# Altium PCB PCB尺子1.pcbdoc (part 2 of 2)
Units mm, origin at the board's own origin, x right, y up, seen from the top; angles counter-clockwise.
Board outline 210 x 40 mm, 2 copper layers (Top Layer, Bottom Layer); 15 components, 42 nets, 33 pads, 0 vias.
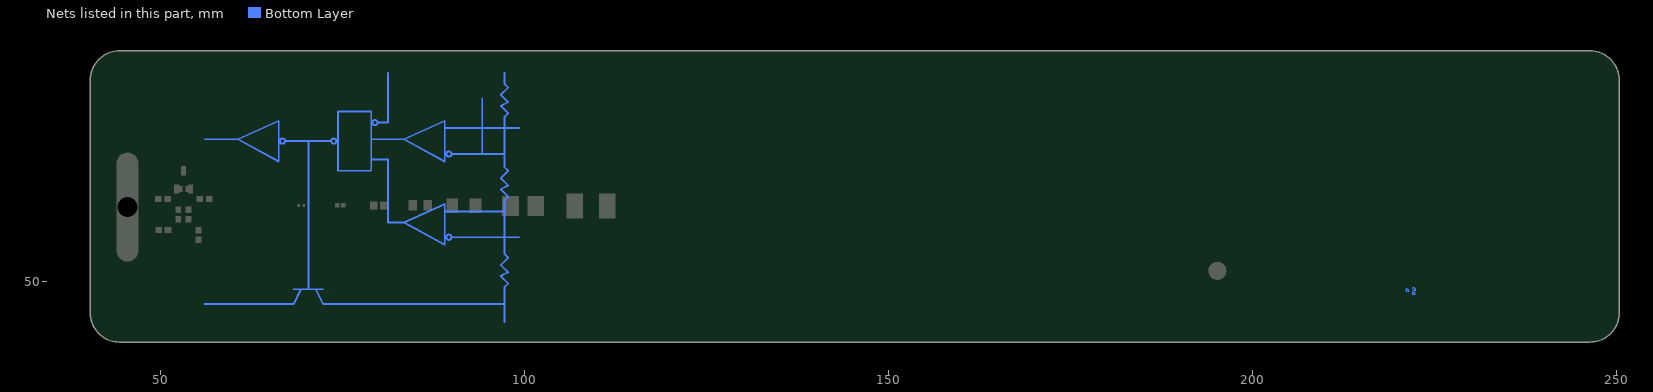
[diagram p2: the nets of this part, all layers, seen from the top]

## Nets (pads, with @x,y where several pads share a name; then routed paths per layer and width w, separated by ;. In a path a pad name is that pad's centre, name@x,y a point inside that pad or via, vN(x,y) a via of type N, cw(c..) or ccw(c..) an arc to the next point about the centre after c; other vN are vias at no path point) (continued)
S$27822:  | length 277.3
  Bottom Layer w0.254: 56.1,46.884 64.002,46.884 68.32,46.884 69.335,48.916 ; 56.125,69.515 60.697,69.515 ; 68.32,48.916 72.384,48.916 ; 70.347,69.261 70.349,54.529 70.349,48.966 ; 71.365,48.916 72.383,46.884 97.275,46.884 ; 73.47,69.261 67.152,69.261 ; 78.985,66.761 78.985,66.721 81.271,66.721 81.271,58.085 83.503,58.085 ; 78.985,69.515 83.503,69.515 ; 81.271,78.659 81.271,71.801 79.852,71.801 ; 89.091,59.614 96.203,59.609 97.273,59.609 ; 89.091,71.041 96.203,71.039 99.305,71.039 ; 90.034,56.053 95.187,56.053 99.305,56.053 ; 90.034,67.483 95.187,67.483 96.257,67.483 97.273,67.483 97.273,72.563 97.781,73.071 96.765,74.087 97.781,74.595 96.765,75.611 97.781,76.627 97.273,77.135 97.273,78.659 ; 94.225,67.483 94.225,75.103 ; 97.273,44.369 97.273,46.909 97.273,49.195 97.781,49.703 96.765,50.719 97.781,51.227 96.765,52.243 97.781,53.259 97.273,53.767 97.273,54.529 97.273,59.609 ; 97.273,67.229 97.273,65.705 97.781,65.197 96.765,64.181 97.781,63.165 96.765,62.657 97.781,61.641 97.273,61.133 97.273,59.609 ; 60.697,69.515 66.285,66.467 66.285,72.055 60.697,69.515 ; 67.152,69.261 ccw(c66.793,69.261) 67.152,69.261 ; 79.852,71.801 ccw(c79.493,71.801) 79.852,71.801 ; 83.503,58.085 89.091,55.037 89.091,60.625 83.503,58.085 ; 83.503,69.515 89.091,66.467 89.091,72.055 83.503,69.515 ; 74.188,69.261 ccw(c73.829,69.261) 74.188,69.261 ; 74.413,65.197 78.985,65.197 78.985,72.817 78.985,73.325 74.413,73.325 74.413,65.197 ; 90.012,56.053 ccw(c89.653,56.053) 90.012,56.053 ; 90.012,67.483 ccw(c89.653,67.483) 90.012,67.483
S$31542:  | length 3.7
  Bottom Layer w0.076: 221.526,48.627 ccw(c221.216,48.627) 221.216,48.938 221.173,48.938 ccw(c221.173,48.862) 221.098,48.862 221.098,48.844 ccw(c221.324,48.844) 221.324,48.618 221.535,48.618 ; 222.402,48.213 ccw(c222.092,48.213) 222.092,48.523 222.049,48.523 ccw(c222.049,48.448) 221.974,48.448 221.974,48.429 ccw(c222.2,48.429) 222.2,48.203 222.412,48.203 ; 222.448,48.815 ccw(c222.138,48.815) 222.138,49.126 222.095,49.126 ccw(c222.095,49.05) 222.02,49.05 222.02,49.032 ccw(c222.246,49.032) 222.246,48.806 222.457,48.806
pads on no net: 0201.1 0201.2 0402.1 0402.2 0603.1 0603.2 0805.1 0805.2 1206.1 1206.2 1210.1 1210.2 1812.1 1812.2 C1.1 C1.2 C2.1 C2.2 C3.1 C3.2 C4.1 C4.2 C5.1 C5.2 C6.1 C6.2 C7.1 C7.2 U6.1 U6.2 U6.3
copper on no net: | length 5
  Top Layer w0.35: 205.867,76.534 205.867,81.534

## Keep-outs
Top Layer:
  lines w0.3 net 1: 180.059,51.318 177.705,51.318 cw(c195.094,51.386) 212.482,51.301 210.441,51.301 ; 180.059,51.318 cw(c195.25,51.453) 210.441,51.301
Keep-Out Layer:
  pour cut-out: 177.69,51.442 177.688,52.064 177.772,53.307 177.945,54.541 178.206,55.759 178.553,56.955 178.985,58.123 179.499,59.257 180.093,60.352 180.764,61.401 181.509,62.4 182.322,63.343 183.202,64.225 184.142,65.042 185.138,65.79 186.185,66.464 187.278,67.062 188.41,67.581 189.577,68.016 190.772,68.368 191.989,68.633 193.222,68.81 194.464,68.898 195.71,68.898 196.952,68.808 198.185,68.629 199.402,68.363 200.596,68.011 201.763,67.574 202.895,67.055 203.987,66.456 205.033,65.78 206.029,65.031 206.968,64.213 207.846,63.33 208.659,62.387 209.403,61.387 210.072,60.337 210.666,59.242 211.179,58.107 211.61,56.938 211.956,55.742 212.215,54.524 212.387,53.29 212.47,52.047 212.467,51.425 210.426,51.425 210.42,52.025 210.337,53.222 210.16,54.409 209.89,55.578 209.528,56.722 209.078,57.834 208.54,58.907 207.92,59.935 207.221,60.91 206.447,61.827 205.603,62.68 204.694,63.463 203.726,64.173 202.706,64.804 201.638,65.352 200.531,65.815 199.391,66.188 198.224,66.471 197.04,66.66 195.843,66.756 194.643,66.756 193.447,66.662 192.262,66.474 191.095,66.193 189.955,65.821 188.847,65.36 187.779,64.812 186.757,64.183 185.789,63.474 184.879,62.691 184.034,61.839 183.259,60.923 182.559,59.949 181.937,58.922 181.399,57.85 180.947,56.738 180.584,55.594 180.313,54.426 180.134,53.239 180.05,52.042 180.044,51.442 180.043,51.442
  pour cut-out: 177.69,51.442 177.688,52.064 177.772,53.307 177.945,54.541 178.206,55.759 178.553,56.955 178.985,58.123 179.499,59.257 180.093,60.352 180.764,61.401 181.509,62.4 182.322,63.343 183.202,64.225 184.142,65.042 185.138,65.79 186.185,66.464 187.278,67.062 188.41,67.581 189.577,68.016 190.772,68.368 191.989,68.633 193.222,68.81 194.464,68.898 195.71,68.898 196.952,68.808 198.185,68.629 199.402,68.363 200.596,68.011 201.763,67.574 202.895,67.055 203.987,66.456 205.033,65.78 206.029,65.031 206.968,64.213 207.846,63.33 208.659,62.387 209.403,61.387 210.072,60.337 210.666,59.242 211.179,58.107 211.61,56.938 211.956,55.742 212.215,54.524 212.387,53.29 212.47,52.047 212.467,51.425 210.426,51.425 210.42,52.025 210.337,53.222 210.16,54.409 209.89,55.578 209.528,56.722 209.078,57.834 208.54,58.907 207.92,59.935 207.221,60.91 206.447,61.827 205.603,62.68 204.694,63.463 203.726,64.173 202.706,64.804 201.638,65.352 200.531,65.815 199.391,66.188 198.224,66.471 197.04,66.66 195.843,66.756 194.643,66.756 193.447,66.662 192.262,66.474 191.095,66.193 189.955,65.821 188.847,65.36 187.779,64.812 186.757,64.183 185.789,63.474 184.879,62.691 184.034,61.839 183.259,60.923 182.559,59.949 181.937,58.922 181.399,57.85 180.947,56.738 180.584,55.594 180.313,54.426 180.134,53.239 180.05,52.042 180.044,51.442 180.043,51.442
  pour cut-out: 177.69,51.442 177.688,52.064 177.772,53.307 177.945,54.541 178.206,55.759 178.553,56.955 178.985,58.123 179.499,59.257 180.093,60.352 180.764,61.401 181.509,62.4 182.322,63.343 183.202,64.225 184.142,65.042 185.138,65.79 186.185,66.464 187.278,67.062 188.41,67.581 189.577,68.016 190.772,68.368 191.989,68.633 193.222,68.81 194.464,68.898 195.71,68.898 196.952,68.808 198.185,68.629 199.402,68.363 200.596,68.011 201.763,67.574 202.895,67.055 203.987,66.456 205.033,65.78 206.029,65.031 206.968,64.213 207.846,63.33 208.659,62.387 209.403,61.387 210.072,60.337 210.666,59.242 211.179,58.107 211.61,56.938 211.956,55.742 212.215,54.524 212.387,53.29 212.47,52.047 212.467,51.425 210.426,51.425 210.42,52.025 210.337,53.222 210.16,54.409 209.89,55.578 209.528,56.722 209.078,57.834 208.54,58.907 207.92,59.935 207.221,60.91 206.447,61.827 205.603,62.68 204.694,63.463 203.726,64.173 202.706,64.804 201.638,65.352 200.531,65.815 199.391,66.188 198.224,66.471 197.04,66.66 195.843,66.756 194.643,66.756 193.447,66.662 192.262,66.474 191.095,66.193 189.955,65.821 188.847,65.36 187.779,64.812 186.757,64.183 185.789,63.474 184.879,62.691 184.034,61.839 183.259,60.923 182.559,59.949 181.937,58.922 181.399,57.85 180.947,56.738 180.584,55.594 180.313,54.426 180.134,53.239 180.05,52.042 180.044,51.442 180.043,51.442
  pour cut-out: 199 vertices and 0 holes, not listed, extent 177.539,51.316 212.618,69.049
  pour cut-out: 199 vertices and 0 holes, not listed, extent 177.539,51.316 212.618,69.049
  lines w0.254: 40.4,45.653 ccw(c44.4,45.653) 44.4,41.653 246.4,41.653 ccw(c246.4,45.653) 250.4,45.653 250.4,77.653 ccw(c246.4,77.653) 246.4,81.653 44.4,81.653 ccw(c44.4,77.653) 40.4,77.653 40.4,45.653
  lines w0.3: 177.69,51.442 cw(c195.079,51.509) 212.467,51.425 210.426,51.425 ; 177.69,51.442 180.043,51.442 ; 180.044,51.442 cw(c195.235,51.576) 210.426,51.425

## Other copper
Top Layer:
  pour cut-out: 199 vertices and 0 holes, not listed, extent 177.555,51.193 212.633,68.925
  pour cut-out: 199 vertices and 0 holes, not listed, extent 177.555,51.193 212.633,68.925
  pour cut-out: 177.705,51.318 177.703,51.941 177.787,53.184 177.96,54.417 178.221,55.635 178.568,56.831 179,58 179.514,59.134 180.108,60.229 180.779,61.278 181.524,62.277 182.338,63.219 183.217,64.102 184.157,64.919 185.153,65.666 186.2,66.341 187.293,66.939 188.425,67.457 189.592,67.893 190.787,68.244 192.004,68.509 193.237,68.686 194.48,68.775 195.725,68.774 196.967,68.684 198.2,68.506 199.417,68.24 200.611,67.888 201.778,67.451 202.91,66.931 204.002,66.332 205.048,65.657 206.044,64.908 206.983,64.09 207.861,63.207 208.674,62.263 209.418,61.264 210.088,60.214 210.681,59.119 211.194,57.984 211.625,56.815 211.971,55.618 212.23,54.4 212.402,53.167 212.485,51.924 212.482,51.301 210.441,51.301 210.435,51.901 210.352,53.098 210.175,54.285 209.905,55.454 209.544,56.599 209.093,57.711 208.556,58.784 207.936,59.811 207.236,60.786 206.462,61.703 205.618,62.556 204.709,63.34 203.742,64.05 202.721,64.68 201.654,65.229 200.546,65.691 199.406,66.065 198.24,66.347 197.055,66.537 195.859,66.632 194.659,66.633 193.462,66.539 192.277,66.351 191.111,66.07 189.97,65.697 188.862,65.236 187.794,64.689 186.773,64.059 185.804,63.351 184.894,62.568 184.049,61.716 183.274,60.8 182.574,59.826 181.953,58.799 181.414,57.726 180.962,56.615 180.599,55.471 180.328,54.302 180.15,53.115 180.066,51.918 180.059,51.318
  pour cut-out: 177.705,51.318 177.703,51.941 177.787,53.184 177.96,54.417 178.221,55.635 178.568,56.831 179,58 179.514,59.134 180.108,60.229 180.779,61.278 181.524,62.277 182.338,63.219 183.217,64.102 184.157,64.919 185.153,65.666 186.2,66.341 187.293,66.939 188.425,67.457 189.592,67.893 190.787,68.244 192.004,68.509 193.237,68.686 194.48,68.775 195.725,68.774 196.967,68.684 198.2,68.506 199.417,68.24 200.611,67.888 201.778,67.451 202.91,66.931 204.002,66.332 205.048,65.657 206.044,64.908 206.983,64.09 207.861,63.207 208.674,62.263 209.418,61.264 210.088,60.214 210.681,59.119 211.194,57.984 211.625,56.815 211.971,55.618 212.23,54.4 212.402,53.167 212.485,51.924 212.482,51.301 210.441,51.301 210.435,51.901 210.352,53.098 210.175,54.285 209.905,55.454 209.544,56.599 209.093,57.711 208.556,58.784 207.936,59.811 207.236,60.786 206.462,61.703 205.618,62.556 204.709,63.34 203.742,64.05 202.721,64.68 201.654,65.229 200.546,65.691 199.406,66.065 198.24,66.347 197.055,66.537 195.859,66.632 194.659,66.633 193.462,66.539 192.277,66.351 191.111,66.07 189.97,65.697 188.862,65.236 187.794,64.689 186.773,64.059 185.804,63.351 184.894,62.568 184.049,61.716 183.274,60.8 182.574,59.826 181.953,58.799 181.414,57.726 180.962,56.615 180.599,55.471 180.328,54.302 180.15,53.115 180.066,51.918 180.059,51.318
  pour cut-out: 177.705,51.318 177.703,51.941 177.787,53.184 177.96,54.417 178.221,55.635 178.568,56.831 179,58 179.514,59.134 180.108,60.229 180.779,61.278 181.524,62.277 182.338,63.219 183.217,64.102 184.157,64.919 185.153,65.666 186.2,66.341 187.293,66.939 188.425,67.457 189.592,67.893 190.787,68.244 192.004,68.509 193.237,68.686 194.48,68.775 195.725,68.774 196.967,68.684 198.2,68.506 199.417,68.24 200.611,67.888 201.778,67.451 202.91,66.931 204.002,66.332 205.048,65.657 206.044,64.908 206.983,64.09 207.861,63.207 208.674,62.263 209.418,61.264 210.088,60.214 210.681,59.119 211.194,57.984 211.625,56.815 211.971,55.618 212.23,54.4 212.402,53.167 212.485,51.924 212.482,51.301 210.441,51.301 210.435,51.901 210.352,53.098 210.175,54.285 209.905,55.454 209.544,56.599 209.093,57.711 208.556,58.784 207.936,59.811 207.236,60.786 206.462,61.703 205.618,62.556 204.709,63.34 203.742,64.05 202.721,64.68 201.654,65.229 200.546,65.691 199.406,66.065 198.24,66.347 197.055,66.537 195.859,66.632 194.659,66.633 193.462,66.539 192.277,66.351 191.111,66.07 189.97,65.697 188.862,65.236 187.794,64.689 186.773,64.059 185.804,63.351 184.894,62.568 184.049,61.716 183.274,60.8 182.574,59.826 181.953,58.799 181.414,57.726 180.962,56.615 180.599,55.471 180.328,54.302 180.15,53.115 180.066,51.918 180.059,51.318
  text "T-V-B挖孔" at 190.373,85.09 h1.52
  text "15" at 195.282,74.289 h2.5
  text "14" at 185.083,72.949 h2.5
  text "17" at 215.082,72.949 h2.5
  text "12" at 165.083,72.921 h2.5
  text "13" at 175.083,72.921 h2.5 r359
  text "90" at 194.247,72.935 h1.5
  text "16" at 205.082,72.922 h2.5 r359
  text "18" at 225.082,72.924 h2.5 r359
  text "19" at 235.082,72.921 h2.5 r359
  text "20" at 245.176,72.921 h2.5
  text "1" at 55.01,72.589 h2.5 r180
  text "5" at 95.15,72.59 h2.5 r179
  text "7" at 115.092,72.589 h2.5 r180
  text "11" at 155.01,72.59 h2.5
  text "8" at 125.099,72.557 h2.5 r181
  text "0mm" at 45.106,72.555 h2.5
  text "2" at 65.127,72.554 h2.5 r181
  text "3" at 75.15,72.554 h2.5 r178
  text "6" at 105.091,72.554 h2.5 r181
  text "9" at 135.115,72.554 h2.5 r181
  text "10" at 145.01,72.554 h2.5 r359
  text "4" at 85.216,72.439 h2.5 r149
  text "135" at 178.342,67.07 h1.5 r359
  text "45" at 210.727,66.816 h1.5
  text "英制 Mil" at 58.173,63.53 h2
  text "70°C & W" at 58.112,56.369 h2
  text "1/20" at 67.559,56.314 h2 r7
  text "1/16" at 72.56,56.316 h2 r1
  text "1/10" at 78.059,56.314 h2 r7
  text "1/8" at 84.061,56.314 h2 r5
  text "1/4" at 90.059,56.316 h2 r7
  text "1/3" at 98.059,56.314 h2 r5
  text "1/2" at 107.559,56.314 h2 r5
  text "0" at 217.458,52.084 h1.5 r183
  text "180" at 171.103,51.195 h1.5
  text "8000" at 243.098,49.554 h2.5
  text "2000" at 94.75,48.953 h2.5
  text "3000" at 119.75,48.953 h2.5
  text "5000" at 170.75,48.953 h2.5
  text "7000" at 221.25,48.953 h2.5
  text "1000" at 69.124,48.804 h2.5
  text "0mil" at 43.682,48.718 h2.5
  text "4000" at 145.219,48.104 h2.5
Bottom Layer:
  region net S$27822: 72.32,48.535 71.024,47.874 72.218,47.214
  text "RESET" at 83.176,79.248 h1.2
  text "VCC" at 98.459,79.248 h1.2
  text "70mil" at 206.196,78.32 h2
  text "20mil" at 241.207,78.296 h2
  text "60mil" at 213.407,78.277 h2
  text "50mil" at 220.408,78.277 h2
  text "40mil" at 227.407,78.276 h2
  text "10mil" at 247.907,78.277 h2
  text "30mil" at 234.648,78.266 h2
  text "4" at 82.795,77.719 h1.2 r31
  text "8" at 99,77.701 h1.2 r356
  text "CONT" at 95.84,75.896 h1.2
  text "5" at 95.368,74.366 h1.2 r5
  text "90" at 196.416,72.816 h1.5
  text "100" at 192.929,72.715 h1.5
  text "80" at 200.116,72.515 h1.5
  text "110" at 188.829,71.815 h1.5 r1
  text "70" at 203.516,71.716 h1.5 r359
  text "6" at 98.998,71.552 h1.2 r359
  text "R1" at 78.51,71.418 h1.2
  text "THRES" at 103.785,70.46 h1.2
  text "120" at 185.429,70.416 h1.5 r1
  text "3" at 56.785,70.099 h1.2 r2
  text "60" at 207.514,69.816 h1.5
  text "R" at 78.515,69.259 h1.2
  text "OUT" at 55.553,69.038 h1.2
  text "1" at 75.477,68.827 h1.2
  text "130" at 182.329,68.316 h1.5
  text "50" at 210.716,67.615 h1.5
  text "135" at 180.607,66.815 h1.5 r1
  text "45" at 212.093,66.436 h1.5
  text "S" at 78.436,66.371 h1.2 r4
  text "http://oshwhub.com" at 160.917,65.7 h5
  text "140" at 179.028,65.115 h1.5 r1
  text "40" at 213.215,65.117 h1.5 r1
  text "150" at 176.73,61.917 h1.5
  text "30" at 215.417,61.915 h1.5
  text "立创EDA硬件开源平台" at 152.535,59.065 h3.3
  text "160" at 175.23,58.417 h1.5
  text "20" at 217.116,58.417 h1.5
  text "2" at 98.982,56.536 h1.2 r359
  text "TRIG" at 102.602,55.576 h1.2
  text "170" at 174.328,54.617 h1.5 r1
  text "10" at 218.015,54.616 h1.5 r1
  text "让分享成为一种习惯" at 154.913,52.459 h4.06
  text "180" at 173.729,51.317 h1.5
  text "0" at 217.501,51.316 h1.5 r357
  text "7" at 56.818,47.44 h1.2
  text "DISCH" at 55.594,46.508 h1.2
  text "1" at 99.036,44.494 h1.2
  text "555 Simplified Schematic" at 82.599,43.127 h2.5
  text "GND" at 98.637,42.774 h1.2 r1

## Silkscreen, mask and mechanical layers (free items; w line width, h text height)
Top Overlay:
  lines w0.15: 146.216,53.039 170.216,53.039 ; 146.216,55.439 170.216,55.439 ; 146.216,57.839 170.216,57.839 ; 146.216,60.239 170.216,60.239 ; 146.216,62.439 170.216,62.439 ; 146.216,64.939 170.216,64.939 ; 146.216,67.439 170.216,67.439 ; 146.216,69.747 170.216,69.747 ; 154.201,62.439 154.201,69.747 ; 154.216,50.439 154.216,60.139 ; 146.216,50.439 170.216,50.439 170.216,71.939 146.216,71.939 146.216,50.439
Bottom Overlay:
  text "JLCJLCJLCJLC" at 41.204,56.717 h0.8 r270
Top Solder:
  drawing of 796 lines, arcs and shapes, not listed
  text "15" at 195.282,74.289 h2.5
  text "14" at 185.083,72.95 h2.5
  text "17" at 215.083,72.95 h2.5
  text "12" at 165.083,72.922 h2.5
  text "13" at 175.083,72.922 h2.5 r359
  text "16" at 205.083,72.922 h2.5 r359
  text "18" at 225.083,72.925 h2.5 r359
  text "19" at 235.083,72.922 h2.5 r359
  text "20" at 245.177,72.922 h2.5
  text "1" at 55.01,72.589 h2.5 r180
  text "5" at 95.15,72.59 h2.5 r179
  text "7" at 115.092,72.589 h2.5 r180
  text "11" at 155.01,72.59 h2.5
  text "8" at 125.099,72.557 h2.5 r181
  text "0mm" at 45.106,72.555 h2.5
  text "2" at 65.127,72.554 h2.5 r181
  text "3" at 75.15,72.554 h2.5 r178
  text "6" at 105.091,72.554 h2.5 r181
  text "9" at 135.115,72.554 h2.5 r181
  text "10" at 145.01,72.554 h2.5 r359
  text "4" at 85.216,72.439 h2.5 r149
  text "C" at 142.322,71.158 h1.2 r181
  text "C" at 142.279,71.121 h1.2 r181
  text "NPN管工作状态" at 152.169,70.067 h1.6
  text "NPN管工作状态" at 152.17,70.065 h1.6
  text "Vc > Vb > Ve" at 155.713,68.085 h1.7
  text "Vc > Vb > Ve" at 155.714,68.084 h1.7
  text "放大区" at 147.571,68.019 h1.7
  text "放大区" at 147.572,68.017 h1.7
  text "B" at 136.951,67.951 h1.2 r180
  text "B" at 136.951,67.951 h1.2 r180
  text "肖特基二极管" at 124.735,65.756 h2
  text "肖特基二极管" at 124.735,65.756 h2
  text "普通二极管" at 114.105,65.653 h2
  text "普通二极管" at 114.105,65.653 h2
  text "Vb>Ve、Vb>Vc" at 155.713,65.585 h1.7
  text "Vb>Ve、Vb>Vc" at 155.714,65.583 h1.7
  text "饱和区" at 147.556,65.521 h1.7
  text "饱和区" at 147.557,65.519 h1.7
  text "E" at 142.369,63.604 h1.2 r180
  text "E" at 142.369,63.604 h1.2 r180
  text "英制 Mil" at 58.173,63.53 h2
  text "0402" at 72.483,63.508 h2
  text "0201" at 67.134,63.423 h2
  text "0603" at 77.633,63.423 h2
  text "0805" at 83.133,63.423 h2
  text "1206" at 89.06,63.422 h2
  text "1210" at 97.061,63.423 h2
  text "1812" at 106.561,63.423 h2
  text "截止区" at 147.558,63.019 h1.7
  text "截止区" at 147.559,63.017 h1.7
  text "Vbe < 0.7V（硅管）" at 155.712,62.985 h1.7
  text "Vbe < 0.7V（硅管）" at 155.713,62.983 h1.7
  text "NPN" at 136.044,62.95 h2
  text "NPN" at 136.044,62.95 h2
  text "PNP管工作状态" at 152.008,60.618 h1.6
  text "PNP管工作状态" at 152.009,60.616 h1.6
  text "E" at 142.369,59.348 h1.2 r180
  text "E" at 142.369,59.348 h1.2 r180
  text "发光二极管" at 114.245,59.255 h2
  text "发光二极管" at 114.245,59.255 h2
  text "稳压二极管" at 126.161,59.175 h2
  text "稳压二极管" at 126.161,59.175 h2
  text "放大区" at 147.573,58.517 h1.7
  text "放大区" at 147.574,58.515 h1.7
  text "Ve > Vb > Vc" at 155.712,58.487 h1.7
  text "Ve > Vb > Vc" at 155.713,58.485 h1.7
  text "B" at 137.001,56.551 h1.2 r180
  text "B" at 137.001,56.551 h1.2 r180
  text "70°C & W" at 58.112,56.369 h2
  text "1/20" at 67.559,56.314 h2 r7
  text "1/16" at 72.56,56.316 h2 r1
  text "1/10" at 78.059,56.314 h2 r7
  text "1/8" at 84.061,56.314 h2 r5
  text "1/4" at 90.059,56.316 h2 r7
  text "1/3" at 98.059,56.314 h2 r5
  text "1/2" at 107.559,56.314 h2 r5
  text "Vb<Ve、Vb<Vc" at 155.712,56.087 h1.7
  text "Vb<Ve、Vb<Vc" at 155.713,56.085 h1.7
  text "饱和区" at 147.556,55.922 h1.7
  text "饱和区" at 147.557,55.921 h1.7
  text "Veb < 0.7（硅管）" at 155.612,53.684 h1.7
  text "Veb < 0.7（硅管）" at 155.613,53.682 h1.7
  text "截止区" at 147.558,53.621 h1.7
  text "截止区" at 147.559,53.619 h1.7
  text "光电二极管" at 114.216,52.437 h2
  text "光电二极管" at 114.216,52.437 h2
  text "变容二极管" at 125.607,52.246 h2
  text "变容二极管" at 125.607,52.246 h2
  text "C" at 142.279,52.101 h1.2 r181
  text "C" at 142.279,52.101 h1.2 r181
  text "PNP" at 136.045,51.449 h2
  text "PNP" at 136.045,51.449 h2
  text "Δ I c = β Δ I b" at 155.66,51.063 h1.7 r2
  text "Δ I c = β Δ I b" at 155.661,51.062 h1.7 r2
  text "重要公式" at 146.92,51.026 h1.7
  text "重要公式" at 146.921,51.024 h1.7
  text "8000" at 243.1,49.546 h2.5
  text "2000" at 94.751,48.953 h2.5
  text "3000" at 119.751,48.953 h2.5
  text "5000" at 170.751,48.953 h2.5
  text "7000" at 221.251,48.953 h2.5
  text "1000" at 69.125,48.804 h2.5
  text "0mil" at 43.682,48.718 h2.5
  text "4000" at 145.219,48.104 h2.5
Bottom Solder:
  circle w0.254: c70.349,69.236 r0.254
  circle w0.254: c89.642,67.483 r0.359
  circle w0.254: c89.642,56.053 r0.359
  circle w0.254: c94.214,67.483 r0.254
  circle w0.254: c97.262,67.483 r0.254
  circle w0.254: c97.262,59.609 r0.254
  circle w0.254: c73.818,69.261 r0.359
  circle w0.254: c66.782,69.261 r0.359
  circle w0.254: c79.482,71.801 r0.359
  circle w0.254: c97.262,46.884 r0.254
  region: 72.309,48.535 71.013,47.874 72.207,47.214
  lines w0.076: 221.526,48.629 ccw(c221.216,48.629) 221.216,48.939 221.173,48.939 ccw(c221.173,48.864) 221.098,48.864 221.098,48.845 ccw(c221.324,48.845) 221.324,48.619 221.535,48.619 ; 222.402,48.214 ccw(c222.092,48.214) 222.092,48.525 222.049,48.525 ccw(c222.049,48.449) 221.974,48.449 221.974,48.431 ccw(c222.2,48.431) 222.2,48.205 222.412,48.205 ; 222.448,48.817 ccw(c222.138,48.817) 222.138,49.127 222.095,49.127 ccw(c222.095,49.052) 222.02,49.052 222.02,49.033 ccw(c222.246,49.033) 222.246,48.807 222.457,48.807 ; 245.45,38.1 ccw(c245.45,38.326) 245.676,38.326
  lines w0.254: 56.089,46.884 63.991,46.884 68.309,46.884 69.324,48.916 ; 56.114,69.515 60.686,69.515 ; 67.141,69.261 73.459,69.261 ; 68.309,48.916 72.373,48.916 ; 70.336,69.261 70.338,54.529 70.338,48.966 ; 71.354,48.916 72.372,46.884 97.264,46.884 ; 78.974,66.761 78.974,66.721 81.26,66.721 81.26,58.085 83.492,58.085 ; 78.974,69.515 83.492,69.515 ; 79.841,71.801 81.26,71.801 81.26,78.659 ; 89.08,59.614 96.192,59.609 97.262,59.609 ; 89.08,71.041 96.192,71.039 99.294,71.039 ; 90.023,56.053 95.176,56.053 99.294,56.053 ; 90.023,67.483 95.176,67.483 96.246,67.483 97.262,67.483 97.262,72.563 97.77,73.071 96.754,74.087 97.77,74.595 96.754,75.611 97.77,76.627 97.262,77.135 97.262,78.659 ; 94.214,67.483 94.214,75.103 ; 97.262,44.369 97.262,46.909 97.262,49.195 97.77,49.703 96.754,50.719 97.77,51.227 96.754,52.243 97.77,53.259 97.262,53.767 97.262,54.529 97.262,59.609 ; 97.262,67.229 97.262,65.705 97.77,65.197 96.754,64.181 97.77,63.165 96.754,62.657 97.77,61.641 97.262,61.133 97.262,59.609 ; 60.686,69.515 66.274,66.467 66.274,72.055 60.686,69.515 ; 83.492,58.085 89.08,55.037 89.08,60.625 83.492,58.085 ; 83.492,69.515 89.08,66.467 89.08,72.055 83.492,69.515 ; 74.402,65.197 78.974,65.197 78.974,72.817 78.974,73.325 74.402,73.325 74.402,65.197
  lines w0.356: 174.57,55.151 192.735,51.907 ; 175.49,58.59 192.846,52.319 ; 177.043,61.942 193.028,52.712 ; 179.203,65.019 193.275,53.065 ; 180.373,66.294 193.424,53.228 ; 181.873,67.66 193.583,53.374 ; 184.773,69.67 193.939,53.624 ; 187.96,71.163 194.336,53.809 ; 191.572,72.143 194.752,53.92 ; 192.696,51.47 cw(c195.185,51.47) 197.674,51.47 ; 195.199,72.467 195.216,51.439 ; 195.62,53.92 198.793,72.165 ; 196.036,53.808 202.455,71.19 ; 196.429,53.625 205.661,69.702 ; 196.781,53.379 208.772,67.529 ; 196.945,53.23 210.165,66.245 ; 197.084,53.078 211.456,64.816 ; 197.337,52.72 213.429,61.971 ; 197.515,52.344 214.947,58.735 ; 197.638,51.892 215.969,54.86 ; 243.216,75.439 246.216,75.439
  lines w0.402: 174.245,51.467 cw(c195.245,51.467) 216.245,51.467 ; 174.245,51.467 cw(c195.245,51.467) 216.245,51.467 ; 174.245,51.467 216.245,51.467
  lines w0.61: 237.206,75.468 240.206,75.468
  lines w0.864: 230.216,75.439 233.216,75.439
  lines w1.118: 223.216,75.439 226.216,75.439
  lines w1.372: 216.216,75.439 219.216,75.439
  lines w1.626: 209.182,75.359 212.182,75.359
  lines w1.88: 201.716,75.439 204.716,75.439
  text "RESET" at 83.165,79.248 h1.2
  text "VCC" at 98.448,79.248 h1.2
  text "70mil" at 206.196,78.32 h2
  text "20mil" at 241.207,78.296 h2
  text "60mil" at 213.407,78.277 h2
  text "50mil" at 220.408,78.277 h2
  text "40mil" at 227.407,78.276 h2
  text "10mil" at 247.907,78.277 h2
  text "30mil" at 234.648,78.266 h2
  text "4" at 82.784,77.719 h1.2 r31
  text "8" at 98.989,77.701 h1.2 r356
  text "CONT" at 95.829,75.896 h1.2
  text "5" at 95.357,74.366 h1.2 r5
  text "90" at 196.416,72.816 h1.5
  text "100" at 192.929,72.715 h1.5
  text "80" at 200.116,72.515 h1.5
  text "110" at 188.829,71.815 h1.5 r1
  text "70" at 203.516,71.716 h1.5 r359
  text "6" at 98.987,71.552 h1.2 r359
  text "R1" at 78.51,71.418 h1.2
  text "THRES" at 103.775,70.46 h1.2
  text "120" at 185.429,70.416 h1.5 r1
  text "3" at 56.774,70.099 h1.2 r2
  text "60" at 207.514,69.816 h1.5
  text "R" at 78.515,69.259 h1.2
  text "OUT" at 55.542,69.038 h1.2
  text "1" at 75.477,68.827 h1.2
  text "130" at 182.329,68.316 h1.5
  text "50" at 210.716,67.615 h1.5
  text "135" at 180.607,66.815 h1.5 r1
  text "45" at 212.093,66.436 h1.5
  text "S" at 78.436,66.371 h1.2 r4
  text "http://oshwhub.com" at 160.917,65.7 h5
  text "140" at 179.028,65.115 h1.5 r1
  text "40" at 213.215,65.117 h1.5 r1
  text "150" at 176.73,61.917 h1.5
  text "30" at 215.417,61.915 h1.5
  text "立创EDA硬件开源平台" at 152.535,59.065 h3.3
  text "160" at 175.23,58.417 h1.5
  text "20" at 217.116,58.417 h1.5
  text "2" at 98.971,56.536 h1.2 r359
  text "TRIG" at 102.591,55.576 h1.2
  text "170" at 174.328,54.617 h1.5 r1
  text "10" at 218.015,54.616 h1.5 r1
  text "让分享成为一种习惯" at 154.913,52.459 h4.06
  text "180" at 173.729,51.317 h1.5
  text "0" at 217.501,51.316 h1.5 r357
  text "7" at 56.807,47.44 h1.2
  text "DISCH" at 55.583,46.508 h1.2
  text "1" at 99.025,44.494 h1.2
  text "555 Simplified Schematic" at 82.599,43.127 h2.5
  text "GND" at 98.626,42.774 h1.2 r1
Document:
  lines w0.003: 144.288,59.925 144.339,59.975